# Altium PCB MGMEZZ04.PcbDoc (part 2 of 9)
Units mil, origin at the board's own origin, x right, y up, seen from the top; angles counter-clockwise.
Board outline 3790 x 5472.44 mil, 10 copper layers (TopLayer, InternalPlane1, MidLayer1, InternalPlane2, MidLayer2, MidLayer3, InternalPlane3, MidLayer4, InternalPlane4, BottomLayer), stack 57.08 mil thick; 846 components, 745 nets, 3323 pads, 1906 vias.
Unrouted connection lines stored in the file: 128.
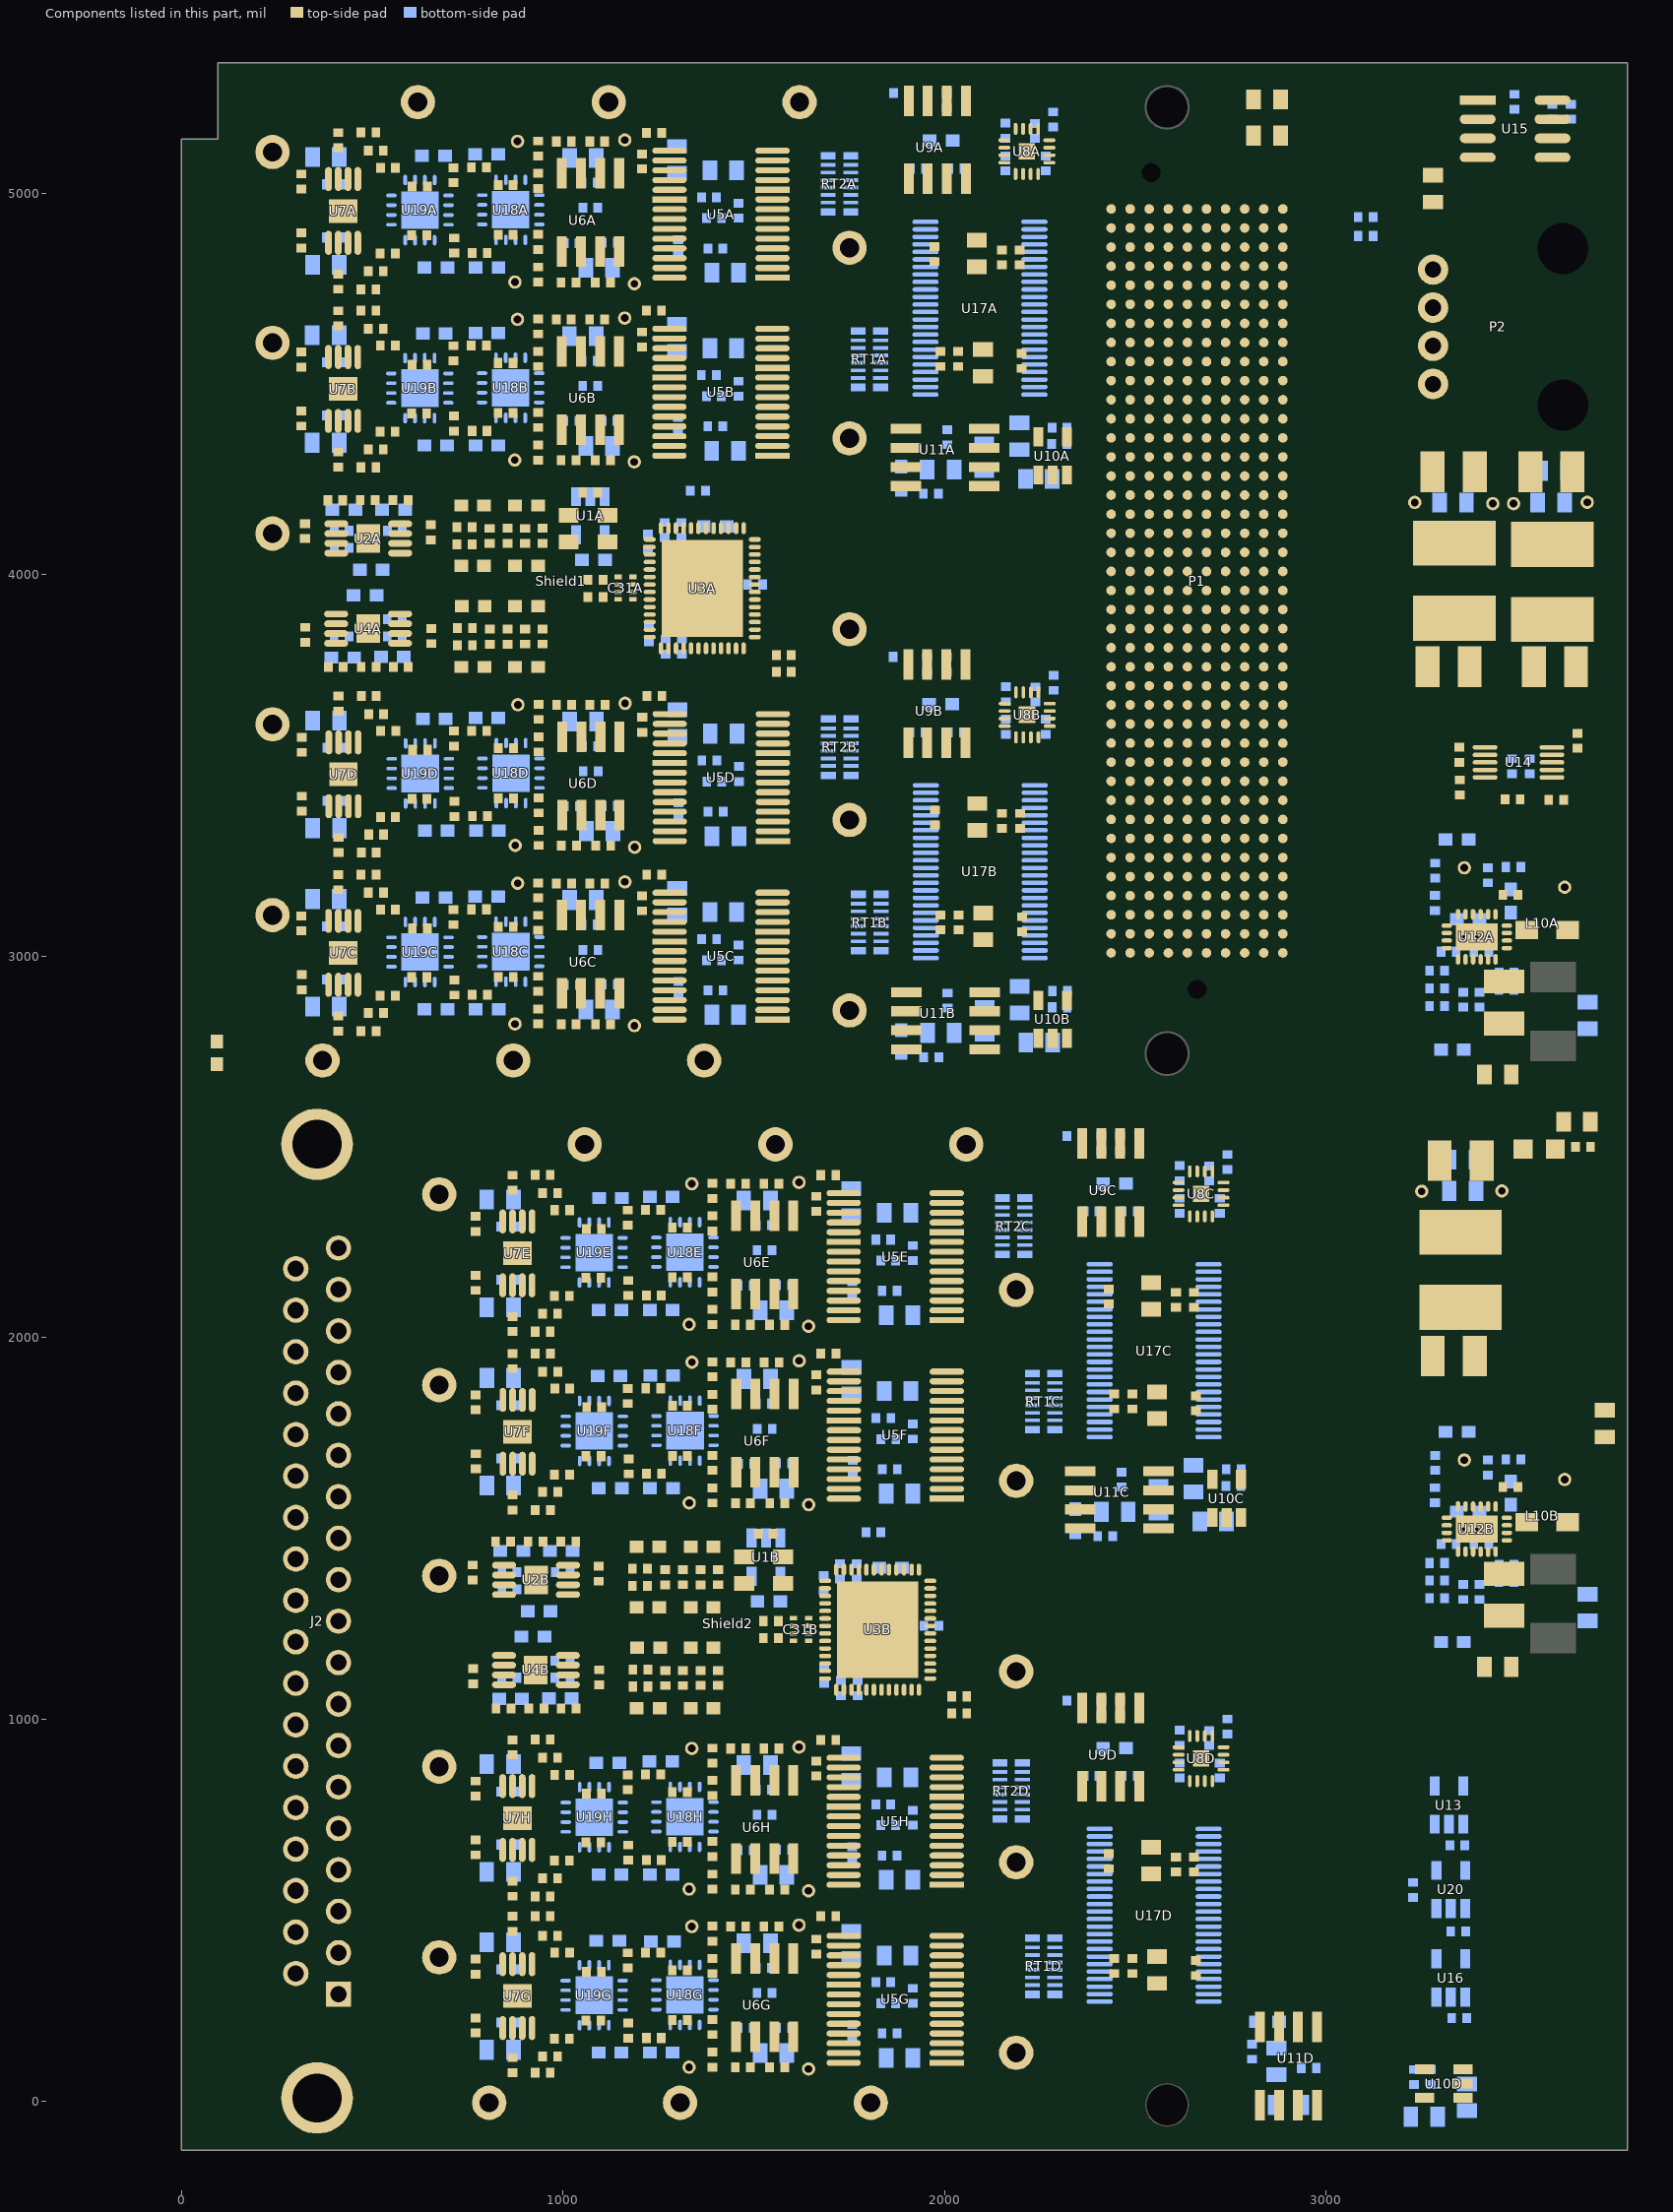
[diagram p10: the components of this part, seen from the top]

## Components (designator, comment, footprint, x,y, rotation, side; value= is the part's Value field where it differs from the comment) (continued)
C95C "0.1uF, 0402" 0402 603.85,2945.02 r0 top (schematic designator C95)
C95D "0.1uF, 0402" 0402 604.47,3412.99 r0 top (schematic designator C95)
C95E "0.1uF, 0402" 0402 1060.16,2157.34 r0 top (schematic designator C95)
C95F "0.1uF, 0402" 0402 1060.54,1689.63 r0 top (schematic designator C95)
C95G "0.1uF, 0402" 0402 1060.16,210.63 r0 top (schematic designator C95)
C95H "0.1uF, 0402" 0402 1060.16,677.34 r0 top (schematic designator C95)
C96A "4.7uF, 10V" 0805 1087.11,5092.29 r180 bottom (schematic designator C96)
C96B "4.7uF, 10V" 0805 1086.86,4625.62 r180 bottom (schematic designator C96)
C96C "4.7uF, 10V" 0805 1087.31,3147.66 r180 bottom (schematic designator C96)
C96D "4.7uF, 10V" 0805 1087.92,3615.62 r180 bottom (schematic designator C96)
C96E "4.7uF, 10V" 0805 1543.61,2359.98 r180 bottom (schematic designator C96)
C96F "4.7uF, 10V" 0805 1544,1892.27 r180 bottom (schematic designator C96)
C96G "4.7uF, 10V" 0805 1543.61,413.27 r180 bottom (schematic designator C96)
C96H "4.7uF, 10V" 0805 1543.61,879.98 r180 bottom (schematic designator C96)
C97A "0.1uF, 0402" 0402 1258.48,5158.65 r180 top (schematic designator C97)
C97B "0.1uF, 0402" 0402 1258.23,4691.99 r180 top (schematic designator C97)
C97C "0.1uF, 0402" 0402 1258.68,3214.02 r180 top (schematic designator C97)
C97D "0.1uF, 0402" 0402 1259.29,3681.99 r180 top (schematic designator C97)
C97E "0.1uF, 0402" 0402 1714.98,2426.34 r180 top (schematic designator C97)
C97F "0.1uF, 0402" 0402 1715.37,1958.63 r180 top (schematic designator C97)
C97G "0.1uF, 0402" 0402 1714.98,483.63 r180 top (schematic designator C97)
C97H "0.1uF, 0402" 0402 1714.98,946.34 r180 top (schematic designator C97)
C98A "DNL" 0805 1299.11,5052.65 r90 bottom (schematic designator C98)
C98B "DNL" 0805 1298.86,4585.99 r90 bottom (schematic designator C98)
C98C "DNL" 0805 1299.31,3108.02 r90 bottom (schematic designator C98)
C98D "DNL" 0805 1299.92,3575.99 r90 bottom (schematic designator C98)
C98E "DNL" 0805 1755.61,2320.34 r90 bottom (schematic designator C98)
C98F "DNL" 0805 1756,1852.63 r90 bottom (schematic designator C98)
C98G "DNL" 0805 1755.61,373.63 r90 bottom (schematic designator C98)
C98H "DNL" 0805 1755.61,840.34 r90 bottom (schematic designator C98)
C99 "0.1uF, 0402" 0402 3493,5220 r90 bottom
C100 "33uF" CC3225-1210 3333.88,4270 r180 top
C101 "33uF" CC3225-1210 3320.88,3759.14 r0 top
C102A "4.7uF, 10V" 0805 2024.71,4276 r180 bottom (schematic designator C102)
C102B "4.7uF, 10V" 0805 2025.53,2799.34 r180 bottom (schematic designator C102)
C102C "4.7uF, 10V" 0805 2481.22,1543.69 r180 bottom (schematic designator C102)
C102D "4.7uF, 10V" 0805 2869.53,68.36 r90 bottom (schematic designator C102)
C104 "0.1uF, 0402" 0402 3486.98,3517.61 r270 bottom
C110A "4.7uF, 10V" 0805 2196,4328 r90 bottom (schematic designator C110)
C110B "4.7uF, 10V" 0805 2196.81,2851.34 r90 bottom (schematic designator C110)
C110C "4.7uF, 10V" 0805 2652.5,1595.69 r90 bottom (schematic designator C110)
C110D "4.7uF, 10V" 0805 3291.81,-41.81 r180 bottom (schematic designator C110)
C114A "4.7uF, 10V" 0805 2084.93,4877.02 r270 top (schematic designator C114)
C114B "4.7uF, 10V" 0805 2085.74,3400.36 r270 top (schematic designator C114)
C114C "4.7uF, 10V" 0805 2541.43,2144.71 r270 top (schematic designator C114)
C114D "4.7uF, 10V" 0805 2541.43,664.71 r270 top (schematic designator C114)
C115A "0.1uF, 0402" 0402 2149.93,4851.39 r270 top (schematic designator C115)
C115B "0.1uF, 0402" 0402 2150.74,3374.73 r270 top (schematic designator C115)
C115C "0.1uF, 0402" 0402 2606.43,2119.08 r270 top (schematic designator C115)
C115D "0.1uF, 0402" 0402 2606.43,639.08 r270 top (schematic designator C115)
C116A "4.7uF, 10V" 0805 2100.5,4520.22 r90 top (schematic designator C116)
C116B "4.7uF, 10V" 0805 2101.32,3043.56 r90 top (schematic designator C116)
C116C "4.7uF, 10V" 0805 2557.01,1787.91 r90 top (schematic designator C116)
C116D "4.7uF, 10V" 0805 2557.01,307.91 r90 top (schematic designator C116)
C117A "0.1uF, 0402" 0402 2035.5,4545.85 r90 top (schematic designator C117)
C117B "0.1uF, 0402" 0402 2036.32,3069.19 r90 top (schematic designator C117)
C117C "0.1uF, 0402" 0402 2492.01,1813.54 r90 top (schematic designator C117)
C117D "0.1uF, 0402" 0402 2492.01,333.54 r90 top (schematic designator C117)
DP1 "LED, 0805, Yellow" 0805L 3600,2495 r180 top
In1 "TestPoint" TP-3520-SK 3684,4190 r0 bottom
In2 "TestPoint" TP-3520-SK 3491,4186.42 r0 bottom
IoutA1A "TestPoint" TP-3520-SK 1187.11,4762.65 r270 top (schematic designator IoutA1)
IoutA1B "TestPoint" TP-3520-SK 1186.86,4295.99 r270 top (schematic designator IoutA1)
IoutA1C "TestPoint" TP-3520-SK 1187.31,2818.02 r270 top (schematic designator IoutA1)
IoutA1D "TestPoint" TP-3520-SK 1187.92,3285.99 r270 top (schematic designator IoutA1)
IoutA1E "TestPoint" TP-3520-SK 1643.61,2030.34 r270 top (schematic designator IoutA1)
IoutA1F "TestPoint" TP-3520-SK 1644,1562.63 r270 top (schematic designator IoutA1)
IoutA1G "TestPoint" TP-3520-SK 1643.61,83.63 r270 top (schematic designator IoutA1)
IoutA1H "TestPoint" TP-3520-SK 1643.61,550.34 r270 top (schematic designator IoutA1)
IoutB1A "TestPoint" TP-3520-SK 1162.11,5139.65 r270 top (schematic designator IoutB1)
IoutB1B "TestPoint" TP-3520-SK 1161.86,4672.99 r270 top (schematic designator IoutB1)
IoutB1C "TestPoint" TP-3520-SK 1162.31,3195.02 r270 top (schematic designator IoutB1)
IoutB1D "TestPoint" TP-3520-SK 1162.92,3662.99 r270 top (schematic designator IoutB1)
IoutB1E "TestPoint" TP-3520-SK 1618.61,2407.34 r270 top (schematic designator IoutB1)
IoutB1F "TestPoint" TP-3520-SK 1619,1939.63 r270 top (schematic designator IoutB1)
IoutB1G "TestPoint" TP-3520-SK 1618.61,460.63 r270 top (schematic designator IoutB1)
IoutB1H "TestPoint" TP-3520-SK 1618.61,927.34 r270 top (schematic designator IoutB1)
Ip1 "TestPoint" TP-3520-SK 3460.38,2385 r270 bottom
Ip2 "TestPoint" TP-3520-SK 3250.38,2384 r270 bottom
Ip3 "TestPoint" TP-3520-SK 3436.65,4186.42 r0 bottom
Ip4 "TestPoint" TP-3520-SK 3232,4189.42 r0 bottom
J2 "DB37F_Resize" DSUB37-F -18.11,931.67 r90 top
L1A "2.7uH" 0603 733.25,4181.49 r0 top (schematic designator L1)
L1B "2.7uH" 0603 1192.94,1451.84 r0 top (schematic designator L1)
L2A "2.7uH" 0603 874.88,4181.49 r0 top (schematic designator L2)
L2B "2.7uH" 0603 1334.57,1451.84 r0 top (schematic designator L2)
L3A "2.7uH" 0603 733.25,4023.49 r0 top (schematic designator L3)
L3B "2.7uH" 0603 1192.94,1293.84 r0 top (schematic designator L3)
L4A "2.7uH" 0603 874.88,4023.49 r0 top (schematic designator L4)
L4B "2.7uH" 0603 1334.57,1293.84 r0 top (schematic designator L4)
L5A "2.7uH" 0603 735.07,3917.49 r0 top (schematic designator L5)
L5B "2.7uH" 0603 1194.76,1187.84 r0 top (schematic designator L5)
L6A "2.7uH" 0603 874.88,3917.49 r0 top (schematic designator L6)
L6B "2.7uH" 0603 1334.57,1187.84 r0 top (schematic designator L6)
L7A "2.7uH" 0603 733.88,3758.49 r0 top (schematic designator L7)
L7B "2.7uH" 0603 1193.57,1028.84 r0 top (schematic designator L7)
L8A "2.7uH" 0603 874.88,3758.49 r0 top (schematic designator L8)
L8B "2.7uH" 0603 1334.57,1028.84 r0 top (schematic designator L8)
L9 "68uH" CHOKEPM54 3335.53,4082.69 r270 top
L10A "1.5uH" IHLP-1212 3579.14,3069.01 r0 top (schematic designator L10)
L10B "1.5uH" IHLP-1212 3579.14,1516.63 r0 top (schematic designator L10)
L12 "68uH" CHOKEPM54 3351.92,2276.27 r270 top
L13 "68uH" CHOKEPM54 3592.42,3883.55 r90 top
P1 "Samtec - ASP-134602-01" BTB-SM1-27-2V400M 2661.42,3983.86 r270 top locked
P2 "Molex 0705550038" Molex0705550038 3280,4500 r90 top
R1A "402" 0402 654.11,4131.05 r270 top (schematic designator R1)
R1B "402" 0402 1093.8,1401.4 r270 top (schematic designator R1)
R2A "49.9" 0402 722.51,4124.49 r0 top (schematic designator R2)
R2B "49.9" 0402 1182.2,1394.84 r0 top (schematic designator R2)
R3A "49.9" 0402 554.74,4195.77 r0 top (schematic designator R3)
R3B "49.9" 0402 994.43,1466.12 r0 top (schematic designator R3)
R4A "DNL" 0402 468.74,4195.77 r0 top (schematic designator R4)
R4B "DNL" 0402 908.43,1466.12 r0 top (schematic designator R4)
R5A "100" 0402 946.88,4082.49 r90 top (schematic designator R5)
R5B "100" 0402 1406.57,1352.84 r90 top (schematic designator R5)
R6A "49.9" 0402 423.11,4195.05 r180 top (schematic designator R6)
R6B "49.9" 0402 862.8,1465.4 r180 top (schematic designator R6)
R7A "49.9" 0402 722.51,4079.49 r0 top (schematic designator R7)
R7B "49.9" 0402 1182.2,1349.84 r0 top (schematic designator R7)
R8A "402" 0402 324.11,4134.05 r270 top (schematic designator R8)
R8B "402" 0402 763.8,1404.4 r270 top (schematic designator R8)
R9A "402" 0402 325.17,3822.82 r90 top (schematic designator R9)
R9B "402" 0402 764.86,1093.17 r90 top (schematic designator R9)
R10A "49.9" 0402 723.51,3860.49 r0 top (schematic designator R10)
R10B "49.9" 0402 1183.2,1130.84 r0 top (schematic designator R10)
R11A "49.9" 0402 424.54,3758.1 r180 top (schematic designator R11)
R11B "49.9" 0402 864.23,1028.46 r180 top (schematic designator R11)
R12A "DNL" 0402 510.54,3758.1 r180 top (schematic designator R12)
R12B "DNL" 0402 950.23,1028.46 r180 top (schematic designator R12)
R13A "100" 0402 946.88,3818.49 r90 top (schematic designator R13)
R13B "100" 0402 1406.57,1088.84 r90 top (schematic designator R13)
R14A "49.9" 0402 555.45,3758.1 r0 top (schematic designator R14)
R14B "49.9" 0402 995.14,1028.46 r0 top (schematic designator R14)
R15A "49.9" 0402 723.51,3815.49 r0 top (schematic designator R15)
R15B "49.9" 0402 1183.2,1085.84 r0 top (schematic designator R15)
R16A "402" 0402 655.17,3819.82 r90 top (schematic designator R16)
R16B "402" 0402 1094.86,1090.17 r90 top (schematic designator R16)
R17A "2k" 0402 1334.11,4220.05 r0 bottom (schematic designator R17)
R17B "2k" 0402 1793.8,1490.4 r0 bottom (schematic designator R17)
R18A "249" 0402 510,5159 r180 top (schematic designator R18)
R18B "249" 0402 509.75,4692.34 r180 top (schematic designator R18)
R18C "249" 0402 510.2,3214.37 r180 top (schematic designator R18)
R18D "249" 0402 510.81,3682.34 r180 top (schematic designator R18)
R18E "249" 0402 966.5,2426.69 r180 top (schematic designator R18)
R18F "249" 0402 966.89,1958.98 r180 top (schematic designator R18)
R18G "249" 0402 966.5,483.98 r180 top (schematic designator R18)
R18H "249" 0402 966.5,946.69 r180 top (schematic designator R18)
R19A "450" 0402 1022.11,5135.65 r180 top (schematic designator R19)
R19B "450" 0402 1021.86,4668.99 r180 top (schematic designator R19)
R19C "450" 0402 1022.31,3191.02 r180 top (schematic designator R19)
R19D "450" 0402 1022.92,3658.99 r180 top (schematic designator R19)
R19E "450" 0402 1478.61,2403.34 r180 top (schematic designator R19)
R19F "450" 0402 1479,1935.63 r180 top (schematic designator R19)
R19G "450" 0402 1478.61,456.63 r180 top (schematic designator R19)
R19H "450" 0402 1478.61,923.34 r180 top (schematic designator R19)
R20A "2k, 0.5%, 25ppm" 0402 1207.11,5103.02 r270 top (schematic designator R20)
R20B "2k, 0.5%, 25ppm" 0402 1206.86,4636.36 r270 top (schematic designator R20)
R20C "2k, 0.5%, 25ppm" 0402 1207.31,3158.39 r270 top (schematic designator R20)
R20D "2k, 0.5%, 25ppm" 0402 1207.92,3626.36 r270 top (schematic designator R20)
R20E "2k, 0.5%, 25ppm" 0402 1663.61,2370.71 r270 top (schematic designator R20)
R20F "2k, 0.5%, 25ppm" 0402 1664,1903 r270 top (schematic designator R20)
R20G "2k, 0.5%, 25ppm" 0402 1663.61,424 r270 top (schematic designator R20)
R20H "2k, 0.5%, 25ppm" 0402 1663.61,890.71 r270 top (schematic designator R20)
R21 "10k" 0402 3593,5233.37 r270 bottom
R22A "0" 0402 1070.11,5135.65 r0 top (schematic designator R22)
R22B "0" 0402 1069.86,4668.99 r0 top (schematic designator R22)
R22C "0" 0402 1070.31,3191.02 r0 top (schematic designator R22)
R22D "0" 0402 1070.92,3658.99 r0 top (schematic designator R22)
R22E "0" 0402 1526.61,2403.34 r0 top (schematic designator R22)
R22F "0" 0402 1527,1935.63 r0 top (schematic designator R22)
R22G "0" 0402 1526.61,456.63 r0 top (schematic designator R22)
R22H "0" 0402 1526.61,923.34 r0 top (schematic designator R22)
R23A "249" 0402 529.37,5111.45 r180 top (schematic designator R23)
R23B "249" 0402 529.12,4644.79 r180 top (schematic designator R23)
R23C "249" 0402 529.57,3166.82 r180 top (schematic designator R23)
R23D "249" 0402 530.18,3634.79 r180 top (schematic designator R23)
R23E "249" 0402 985.87,2379.14 r180 top (schematic designator R23)
R23F "249" 0402 986.26,1911.43 r180 top (schematic designator R23)
R23G "249" 0402 985.87,432.43 r180 top (schematic designator R23)
R23H "249" 0402 985.87,899.14 r180 top (schematic designator R23)
R24A "10" 0402 314.75,5050.52 r270 top (schematic designator R24)
R24B "10" 0402 314.51,4583.86 r270 top (schematic designator R24)
R24C "10" 0402 314.95,3105.89 r270 top (schematic designator R24)
R24D "10" 0402 315.57,3573.86 r270 top (schematic designator R24)
R24E "10" 0402 771.26,2318.21 r270 top (schematic designator R24)
R24F "10" 0402 771.64,1850.5 r270 top (schematic designator R24)
R24G "10" 0402 771.26,371.5 r270 top (schematic designator R24)
R24H "10" 0402 771.26,838.21 r270 top (schematic designator R24)
R25 "0" 0402 3641,5194 r90 bottom
R26A "249" 0402 529.37,4795.85 r180 top (schematic designator R26)
R26B "249" 0402 529.12,4329.19 r180 top (schematic designator R26)
R26C "249" 0402 529.57,2851.22 r180 top (schematic designator R26)
R26D "249" 0402 530.18,3319.19 r180 top (schematic designator R26)
R26E "249" 0402 985.87,2063.54 r180 top (schematic designator R26)
R26F "249" 0402 986.26,1595.83 r180 top (schematic designator R26)
R26G "249" 0402 985.87,116.83 r180 top (schematic designator R26)
R26H "249" 0402 985.87,583.54 r180 top (schematic designator R26)
R27A "78.7k" 0402 2321.02,4385.43 r180 bottom (schematic designator R27)
R27B "78.7k" 0402 2321.83,2908.77 r180 bottom (schematic designator R27)
R27C "78.7k" 0402 2777.52,1655.12 r180 bottom (schematic designator R27)
R27D "78.7k" 0402 3230.39,82.21 r270 bottom (schematic designator R27)
R28A "24.9k" 0402 2281,4342.99 r0 bottom (schematic designator R28)
R28B "24.9k" 0402 2281.81,2866.32 r0 bottom (schematic designator R28)
R28C "24.9k" 0402 2737.5,1611.68 r0 bottom (schematic designator R28)
R28D "24.9k" 0402 3273.83,43.19 r90 bottom (schematic designator R28)
R29A "10" 0402 314.75,4856.63 r90 top (schematic designator R29)
R29B "10" 0402 314.51,4389.97 r90 top (schematic designator R29)
R29C "10" 0402 315.2,2912.25 r90 top (schematic designator R29)
R29D "10" 0402 315.81,3380.21 r90 top (schematic designator R29)
R29E "10" 0402 771.5,2124.57 r90 top (schematic designator R29)
R29F "10" 0402 771.89,1656.86 r90 top (schematic designator R29)
R29G "10" 0402 771.5,177.86 r90 top (schematic designator R29)
R29H "10" 0402 771.5,644.57 r90 top (schematic designator R29)
R30A "0" 0402 1124.48,4766.45 r180 top (schematic designator R30)
R30B "0" 0402 1124.23,4299.79 r180 top (schematic designator R30)
R30C "0" 0402 1124.68,2821.82 r180 top (schematic designator R30)
R30D "0" 0402 1125.29,3289.79 r180 top (schematic designator R30)
R30E "0" 0402 1580.98,2034.14 r180 top (schematic designator R30)
R30F "0" 0402 1581.37,1566.43 r180 top (schematic designator R30)
R30G "0" 0402 1580.98,87.43 r180 top (schematic designator R30)
R30H "0" 0402 1580.98,554.14 r180 top (schematic designator R30)
R31 "100k" 0402 3123,4887.83 r180 bottom
R32 "100k" 0402 3123,4937.83 r180 bottom
R33A "450" 0402 1034.48,4766.45 r180 top (schematic designator R33)
R33B "450" 0402 1034.23,4299.79 r180 top (schematic designator R33)
R33C "450" 0402 1034.68,2821.82 r180 top (schematic designator R33)
R33D "450" 0402 1035.29,3289.79 r180 top (schematic designator R33)
R33E "450" 0402 1490.98,2034.14 r180 top (schematic designator R33)
R33F "450" 0402 1491.37,1566.43 r180 top (schematic designator R33)
R33G "450" 0402 1490.98,87.43 r180 top (schematic designator R33)
R33H "450" 0402 1490.98,554.14 r180 top (schematic designator R33)
R34A "49.9" 0402 1302.11,4878.65 r270 bottom (schematic designator R34)
R34B "49.9" 0402 1301.86,4411.99 r270 bottom (schematic designator R34)
R34C "49.9" 0402 1302.31,2934.02 r270 bottom (schematic designator R34)
R34D "49.9" 0402 1302.92,3401.99 r270 bottom (schematic designator R34)
R34E "49.9" 0402 1758.61,2146.34 r270 bottom (schematic designator R34)
R34F "49.9" 0402 1759,1678.63 r270 bottom (schematic designator R34)
R34G "49.9" 0402 1758.61,199.63 r270 bottom (schematic designator R34)
R34H "49.9" 0402 1758.61,666.34 r270 bottom (schematic designator R34)
R35A "249" 0402 510,4748.3 r180 top (schematic designator R35)
R35B "249" 0402 509.75,4281.63 r180 top (schematic designator R35)
R35C "249" 0402 510.2,2803.67 r180 top (schematic designator R35)
R35D "249" 0402 510.81,3271.63 r180 top (schematic designator R35)
R35E "249" 0402 966.5,2015.99 r180 top (schematic designator R35)
R35F "249" 0402 966.89,1548.28 r180 top (schematic designator R35)
R35G "249" 0402 966.5,73.28 r180 top (schematic designator R35)
R35H "249" 0402 966.5,535.99 r180 top (schematic designator R35)
R37A "AD0" 0402 2284.65,5212.95 r270 bottom (schematic designator R37)
R37B "AD0" 0402 2285.46,3736.29 r270 bottom (schematic designator R37)
R37C "AD0" 0402 2741.15,2480.64 r270 bottom (schematic designator R37)
R37D "AD0" 0402 2741.15,1000.64 r270 bottom (schematic designator R37)
R38A "NotAD0" 0402 2264.65,5097.95 r270 bottom (schematic designator R38)
R38B "NotAD0" 0402 2265.46,3621.29 r270 bottom (schematic designator R38)
R38C "NotAD0" 0402 2721.15,2365.64 r270 bottom (schematic designator R38)
R38D "NotAD0" 0402 2721.15,885.64 r270 bottom (schematic designator R38)
R39A "31.6k" 0603 1886,4283 r270 bottom (schematic designator R39)
R39B "31.6k" 0603 1886.81,2806.34 r270 bottom (schematic designator R39)
R39C "31.6k" 0603 2342.5,1550.69 r270 bottom (schematic designator R39)
R39D "31.6k" 0603 2876.53,207.07 r180 bottom (schematic designator R39)
R40A "100k" 0402 1984,4212 r180 bottom (schematic designator R40)
R40B "100k" 0402 1984.81,2735.34 r180 bottom (schematic designator R40)
R40C "100k" 0402 2440.5,1479.69 r180 bottom (schematic designator R40)
R40D "100k" 0402 2805.53,109.07 r90 bottom (schematic designator R40)
R41A "AD2" 0402 2159.65,5183.58 r270 bottom (schematic designator R41)
R41B "AD2" 0402 2160.46,3706.92 r270 bottom (schematic designator R41)
R41C "AD2" 0402 2616.15,2451.27 r270 bottom (schematic designator R41)
R41D "AD2" 0402 2616.15,971.27 r270 bottom (schematic designator R41)
R42A "NotAD2" 0402 2159.65,5097.95 r270 bottom (schematic designator R42)
R42B "NotAD2" 0402 2160.46,3621.29 r270 bottom (schematic designator R42)
R42C "NotAD2" 0402 2616.15,2365.64 r270 bottom (schematic designator R42)
R42D "NotAD2" 0402 2616.15,885.64 r270 bottom (schematic designator R42)
R43A "10" 0402 1956.01,5262.6 r270 bottom (schematic designator R43)
R43B "10" 0402 1954.71,3784.89 r270 bottom (schematic designator R43)
R43C "10" 0402 2410.4,2529.24 r270 bottom (schematic designator R43)
R43D "10" 0402 2410.4,1049.24 r270 bottom (schematic designator R43)
R44A "100" 0402 1911,5064.66 r0 bottom (schematic designator R44)
R44B "100" 0402 1909.7,3586.95 r0 bottom (schematic designator R44)
R44C "100" 0402 2365.39,2331.31 r0 bottom (schematic designator R44)
R44D "100" 0402 2365.39,851.31 r0 bottom (schematic designator R44)
R45A "10" 0402 2006,5262.6 r270 bottom (schematic designator R45)
R45B "10" 0402 2005.7,3784.89 r270 bottom (schematic designator R45)
R45C "10" 0402 2460.39,2529.24 r270 bottom (schematic designator R45)
R45D "10" 0402 2460.39,1049.24 r270 bottom (schematic designator R45)
R46A "100" 0402 2050.71,5064.66 r180 bottom (schematic designator R46)
R46B "100" 0402 2049.42,3586.95 r180 bottom (schematic designator R46)
R46C "100" 0402 2505.11,2331.31 r180 bottom (schematic designator R46)
R46D "100" 0402 2505.11,851.31 r180 bottom (schematic designator R46)
R47A "DNL" 0402 2007,4341 r90 bottom (schematic designator R47)
R47B "DNL" 0402 2007.81,2864.34 r90 bottom (schematic designator R47)
R47C "DNL" 0402 2463.5,1608.69 r90 bottom (schematic designator R47)
R47D "DNL" 0402 2934.53,86.07 r0 bottom (schematic designator R47)
R48 "4.99k" 0402 3692.67,2500 r180 top
R49A "0, 0805" 0805 3485,2690 r180 top (schematic designator R49)
R49B "0, 0805" 0805 3485,1137.62 r180 top (schematic designator R49)
R50A "4.99" 0402 3401.99,2866.58 r90 bottom (schematic designator R50)
R50B "4.99" 0402 3401.99,1314.21 r90 bottom (schematic designator R50)
R51A "0, 0805" 0805 3685,2810 r90 bottom (schematic designator R51)
R51B "0, 0805" 0805 3685,1257.62 r90 bottom (schematic designator R51)
R52 "100k" 0402 3348.98,3547.71 r270 top
R53A "100k" 0402 3423.99,3192.64 r90 bottom (schematic designator R53)
R53B "100k" 0402 3423.99,1640.26 r90 bottom (schematic designator R53)
R54A "DNL" 0402 3270.99,2916.01 r0 bottom (schematic designator R54)
R54B "DNL" 0402 3270.99,1363.63 r0 bottom (schematic designator R54)
R55 "0" 0603 93,2777 r270 top
R56 "100" 0402 3228,532.91 r90 bottom
R57A "160k" 0402 3386.99,3012.01 r0 bottom (schematic designator R57)
R57B "160k" 0402 3386.99,1459.63 r0 bottom (schematic designator R57)
R58A "0, 0805" 0805 3622,2566 r0 top (schematic designator R58)
R58B "0, 0805" 0805 3730,1740 r90 top (schematic designator R58)
R59A "160k" 0402 3470.62,3234.01 r0 bottom (schematic designator R59)
R59B "160k" 0402 3470.62,1681.63 r0 bottom (schematic designator R59)
R61A "13k" 0402 3309.99,2870.01 r180 bottom (schematic designator R61)
R61B "13k" 0402 3309.99,1317.63 r180 bottom (schematic designator R61)
R62 "100k" 0402 3622.37,3409.84 r180 top
R63A "100k" 0402 3284.99,3120.01 r90 bottom (schematic designator R63)
R63B "100k" 0402 3284.99,1567.63 r90 bottom (schematic designator R63)
R65A "31.6k" 0402 3285.99,3244.38 r270 bottom (schematic designator R65)
R65B "31.6k" 0402 3285.99,1692 r270 bottom (schematic designator R65)
R68 "100k" 0402 3532.98,3478.24 r90 bottom
R70 "0, 0805" 0805 3392.38,2467 r180 bottom
R71 "0.1 0805" 0805 3392.38,2385 r180 bottom
R73 "0, 0805" 0805 2810,5151 r0 top
R74 "0, 0805" 0805 2810,5246 r0 top
R75 "0, 0805" 0805 3632.42,4272.57 r180 bottom
R76 "0.1 0805" 0805 3624.42,4189.57 r180 bottom
R77 "0.1 0805" 0805 3367.65,4189.42 r180 bottom
R78 "DNL, 0805" 0805 3280,4977 r90 top
R95A "62" 0402 935.11,4806.65 r270 top (schematic designator R95)
R95B "62" 0402 934.86,4339.99 r270 top (schematic designator R95)
R95C "62" 0402 935.31,2862.02 r270 top (schematic designator R95)
R95D "62" 0402 935.92,3329.99 r270 top (schematic designator R95)
R95E "62" 0402 1391.61,2074.34 r270 top (schematic designator R95)
R95F "62" 0402 1392,1606.63 r270 top (schematic designator R95)
R95G "62" 0402 1391.61,127.63 r270 top (schematic designator R95)
R95H "62" 0402 1391.61,594.34 r270 top (schematic designator R95)
R96A "62" 0402 935.11,5097.65 r90 top (schematic designator R96)
R96B "62" 0402 934.86,4630.99 r90 top (schematic designator R96)
R96C "62" 0402 935.31,3153.02 r90 top (schematic designator R96)
R96D "62" 0402 935.92,3620.99 r90 top (schematic designator R96)
R96E "62" 0402 1391.61,2365.34 r90 top (schematic designator R96)
R96F "62" 0402 1392,1897.63 r90 top (schematic designator R96)
R96G "62" 0402 1391.61,418.63 r90 top (schematic designator R96)
R96H "62" 0402 1391.61,885.34 r90 top (schematic designator R96)
R97A "62" 0402 935.11,4852.65 r90 top (schematic designator R97)
R97B "62" 0402 934.86,4385.99 r90 top (schematic designator R97)
R97C "62" 0402 935.31,2908.02 r90 top (schematic designator R97)
R97D "62" 0402 935.92,3375.99 r90 top (schematic designator R97)
R97E "62" 0402 1391.61,2120.34 r90 top (schematic designator R97)
R97F "62" 0402 1392,1652.63 r90 top (schematic designator R97)
R97G "62" 0402 1391.61,173.63 r90 top (schematic designator R97)
R97H "62" 0402 1391.61,640.34 r90 top (schematic designator R97)
R98A "62" 0402 935.11,5012.65 r90 top (schematic designator R98)
R98B "62" 0402 934.86,4545.99 r90 top (schematic designator R98)
R98C "62" 0402 935.31,3068.02 r90 top (schematic designator R98)
R98D "62" 0402 935.92,3535.99 r90 top (schematic designator R98)
R98E "62" 0402 1391.61,2280.34 r90 top (schematic designator R98)
R98F "62" 0402 1392,1812.63 r90 top (schematic designator R98)
R98G "62" 0402 1391.61,333.63 r90 top (schematic designator R98)
R98H "62" 0402 1391.61,800.34 r90 top (schematic designator R98)
R99A "124" 0402 762.11,4843.65 r0 top (schematic designator R99)
R99B "124" 0402 761.86,4376.99 r0 top (schematic designator R99)
R99C "124" 0402 762.31,2899.02 r0 top (schematic designator R99)
R99D "124" 0402 762.92,3366.99 r0 top (schematic designator R99)
R99E "124" 0402 1218.61,2111.34 r0 top (schematic designator R99)
R99F "124" 0402 1219,1643.63 r0 top (schematic designator R99)
R99G "124" 0402 1218.61,164.63 r0 top (schematic designator R99)
R99H "124" 0402 1218.61,631.34 r0 top (schematic designator R99)
R100A "124" 0402 760.11,5067.65 r0 top (schematic designator R100)
R100B "124" 0402 759.86,4600.99 r0 top (schematic designator R100)
R100C "124" 0402 760.31,3123.02 r0 top (schematic designator R100)
R100D "124" 0402 760.92,3590.99 r0 top (schematic designator R100)
R100E "124" 0402 1216.61,2335.34 r0 top (schematic designator R100)
R100F "124" 0402 1217,1867.63 r0 top (schematic designator R100)
R100G "124" 0402 1216.61,388.63 r0 top (schematic designator R100)
R100H "124" 0402 1216.61,855.34 r0 top (schematic designator R100)
R101A "249" 0402 715.11,4882.65 r270 top (schematic designator R101)
R101B "249" 0402 714.86,4415.99 r270 top (schematic designator R101)
R101C "249" 0402 715.31,2938.02 r270 top (schematic designator R101)
R101D "249" 0402 715.92,3405.99 r270 top (schematic designator R101)
R101E "249" 0402 1171.61,2150.34 r270 top (schematic designator R101)
R101F "249" 0402 1172,1682.63 r270 top (schematic designator R101)
R101G "249" 0402 1171.61,203.63 r270 top (schematic designator R101)
R101H "249" 0402 1171.61,670.34 r270 top (schematic designator R101)
R102A "249" 0402 713.11,5027.65 r90 top (schematic designator R102)
R102B "249" 0402 712.86,4560.99 r90 top (schematic designator R102)
R102C "249" 0402 713.31,3083.02 r90 top (schematic designator R102)
R102D "249" 0402 713.92,3550.99 r90 top (schematic designator R102)
R102E "249" 0402 1169.61,2295.34 r90 top (schematic designator R102)
R102F "249" 0402 1170,1827.63 r90 top (schematic designator R102)
R102G "249" 0402 1169.61,348.63 r90 top (schematic designator R102)
R102H "249" 0402 1169.61,815.34 r90 top (schematic designator R102)
R103A "500" 0402 521.11,4841.65 r0 top (schematic designator R103)
R103B "500" 0402 520.86,4374.99 r0 top (schematic designator R103)
R103C "500" 0402 521.31,2897.02 r0 top (schematic designator R103)
R103D "500" 0402 521.92,3364.99 r0 top (schematic designator R103)
R103E "500" 0402 977.61,2109.34 r0 top (schematic designator R103)
R103F "500" 0402 978,1641.63 r0 top (schematic designator R103)
R103G "500" 0402 977.61,162.63 r0 top (schematic designator R103)
R103H "500" 0402 977.61,629.34 r0 top (schematic designator R103)
R104A "500" 0402 561.11,5067.02 r180 top (schematic designator R104)
R104B "500" 0402 560.86,4600.36 r180 top (schematic designator R104)
R104C "500" 0402 561.31,3122.39 r180 top (schematic designator R104)
R104D "500" 0402 561.92,3590.36 r180 top (schematic designator R104)
R104E "500" 0402 1017.61,2334.71 r180 top (schematic designator R104)
R104F "500" 0402 1018,1867 r180 top (schematic designator R104)
R104G "500" 0402 1017.61,388 r180 top (schematic designator R104)
R104H "500" 0402 1017.61,854.71 r180 top (schematic designator R104)
Rfb1A "100k" 0402 3491.99,2912.01 r180 bottom (schematic designator Rfb1)
Rfb1B "100k" 0402 3491.99,1359.63 r180 bottom (schematic designator Rfb1)
Rfb3A "12.1k" 0402 3300.99,3012.01 r0 bottom (schematic designator Rfb3)
Rfb3B "12.1k" 0402 3300.99,1459.63 r0 bottom (schematic designator Rfb3)
RT1A "47, EXB-2HV470JV" 0402_Array_2HV 1832.61,4634.06 r180 bottom (schematic designator RT1)
RT1B "47, EXB-2HV470JV" 0402_Array_2HV 1833.43,3157.39 r180 bottom (schematic designator RT1)
RT1C "47, EXB-2HV470JV" 0402_Array_2HV 2289.12,1901.75 r180 bottom (schematic designator RT1)
RT1D "47, EXB-2HV470JV" 0402_Array_2HV 2289.12,421.75 r180 bottom (schematic designator RT1)
RT2A "47, EXB-2HV470JV" 0402_Array_2HV 1754.06,5093.74 r180 bottom (schematic designator RT2)
RT2B "47, EXB-2HV470JV" 0402_Array_2HV 1754.87,3617.08 r180 bottom (schematic designator RT2)
RT2C "47, EXB-2HV470JV" 0402_Array_2HV 2210.56,2361.43 r180 bottom (schematic designator RT2)
RT2D "47, EXB-2HV470JV" 0402_Array_2HV 2204.06,881.43 r180 bottom (schematic designator RT2)
Shield1 "Shield" "14RA-CBS-1.5X2.5 SHIELD" 239,5239 r0 top locked
Shield2 "Shield" "14RA-CBS-1.5X2.5 SHIELD" 675.82,2507 r0 top locked
TMON2A "TestPoint" TP-3520-SK 3361.99,3232.01 r180 top (schematic designator TMON2)
TMON2B "TestPoint" TP-3520-SK 3361.99,1679.63 r180 top (schematic designator TMON2)
U1A "1.8V Low noise regulator" SOT23-5 1072.11,4204.77 r0 bottom (schematic designator U1)
U1B "1.8V Low noise regulator" SOT23-5 1531.8,1475.12 r0 bottom (schematic designator U1)
U2A "THS4131IDGNR" SOP8-EP-127P600-8N 489.83,4095.11 r0 top (schematic designator U2)
U2B "THS4131IDGNR" SOP8-EP-127P600-8N 929.52,1365.46 r0 top (schematic designator U2)
U3A "LTC2192" QFN50P800X700X80_HS-53N 1365.08,3964.6 r0 top (schematic designator U3)
U3B "LTC2192" QFN50P800X700X80_HS-53N 1824.77,1234.95 r0 top (schematic designator U3)
U4A "THS4131IDGNR" SOP8-EP-127P600-8N 489.45,3858.77 r180 top (schematic designator U4)
U4B "THS4131IDGNR" SOP8-EP-127P600-8N 929.14,1129.12 r180 top (schematic designator U4)
U5A "LTC1668IG  DAC" SOG.65M/28/WG8.20/L10.16 1548.69,4778.65 r90 top (schematic designator U5)
U5B "LTC1668IG  DAC" SOG.65M/28/WG8.20/L10.16 1548.45,4311.99 r90 top (schematic designator U5)
U5C "LTC1668IG  DAC" SOG.65M/28/WG8.20/L10.16 1548.89,2834.02 r90 top (schematic designator U5)
U5D "LTC1668IG  DAC" SOG.65M/28/WG8.20/L10.16 1549.51,3301.99 r90 top (schematic designator U5)
U5E "LTC1668IG  DAC" SOG.65M/28/WG8.20/L10.16 2005.2,2046.34 r90 top (schematic designator U5)
U5F "LTC1668IG  DAC" SOG.65M/28/WG8.20/L10.16 2005.58,1578.63 r90 top (schematic designator U5)
U5G "LTC1668IG  DAC" SOG.65M/28/WG8.20/L10.16 2005.2,99.63 r90 top (schematic designator U5)
U5H "LTC1668IG  DAC" SOG.65M/28/WG8.20/L10.16 2005.2,566.34 r90 top (schematic designator U5)
U6A "LT6201" SO8 997.32,4847.29 r90 top (schematic designator U6)
U6B "LT6201" SO8 997.08,4380.62 r90 top (schematic designator U6)
U6C "LT6201" SO8 997.52,2902.66 r90 top (schematic designator U6)
U6D "LT6201" SO8 998.14,3370.62 r90 top (schematic designator U6)
U6E "LT6201" SO8 1453.83,2114.98 r90 top (schematic designator U6)
U6F "LT6201" SO8 1454.21,1647.27 r90 top (schematic designator U6)
U6G "LT6201" SO8 1453.83,168.27 r90 top (schematic designator U6)
U6H "LT6201" SO8 1453.83,634.98 r90 top (schematic designator U6)
U7A "THS4131IDGNR" SOP8-EP-127P600-8N 424.11,4953.65 r270 top (schematic designator U7)
U7B "THS4131IDGNR" SOP8-EP-127P600-8N 423.86,4486.99 r270 top (schematic designator U7)
U7C "THS4131IDGNR" SOP8-EP-127P600-8N 424.31,3009.02 r270 top (schematic designator U7)
U7D "THS4131IDGNR" SOP8-EP-127P600-8N 424.92,3476.99 r270 top (schematic designator U7)
U7E "THS4131IDGNR" SOP8-EP-127P600-8N 880.61,2221.34 r270 top (schematic designator U7)
U7F "THS4131IDGNR" SOP8-EP-127P600-8N 881,1753.63 r270 top (schematic designator U7)
U7G "THS4131IDGNR" SOP8-EP-127P600-8N 880.61,274.63 r270 top (schematic designator U7)
U7H "THS4131IDGNR" SOP8-EP-127P600-8N 880.61,741.34 r270 top (schematic designator U7)
U8A "MAX7320ATE" QFN127P600-8N-MAX7319 2215.64,5109.57 r0 top (schematic designator U8)
U8B "MAX7320ATE" QFN127P600-8N-MAX7319 2216.45,3632.91 r0 top (schematic designator U8)
U8C "MAX7320ATE" QFN127P600-8N-MAX7319 2672.14,2377.26 r0 top (schematic designator U8)
U8D "MAX7320ATE" QFN127P600-8N-MAX7319 2672.14,897.26 r0 top (schematic designator U8)
U9A "Clock buffer" SO8 1906.01,5037.6 r90 top (schematic designator U9)
U9B "Clock buffer" SO8 1904.71,3559.89 r90 top (schematic designator U9)
U9C "Clock buffer" SO8 2360.4,2304.24 r90 top (schematic designator U9)
U9D "Clock buffer" SO8 2360.4,824.24 r90 top (schematic designator U9)
U10A "TPS73601DBVR" SOT23-5 2282.78,4261.42 r0 top (schematic designator U10)
U10B "TPS73601DBVR" SOT23-5 2283.59,2784.76 r0 top (schematic designator U10)
U10C "TPS73601DBVR" SOT23-5 2739.28,1529.11 r0 top (schematic designator U10)
U10D "TPS73601DBVR" SOT23-5 3358.39,44.97 r90 top (schematic designator U10)
U11A "LT1175IS8" SO8 1899.38,4382.62 r0 top (schematic designator U11)
U11B "LT1175IS8" SO8 1900.19,2905.95 r0 top (schematic designator U11)
U11C "LT1175IS8" SO8 2355.88,1650.31 r0 top (schematic designator U11)
U11D "LT1175IS8" SO8 2976.14,193.69 r270 top (schematic designator U11)
U12A "LTC3626" LTC3626 3394.78,3051.06 r270 top (schematic designator U12)
U12B "LTC3626" LTC3626 3394.78,1498.68 r270 top (schematic designator U12)
U13 "SN65LVDS1DBVR" SOT23-5 3321.37,725.43 r180 bottom
U14 "LT1715" TSSOP50P490X110-10N 3503.98,3508.24 r180 top
U15 "AT24C1024B - EEPROM" SO8/L200 3396.82,5243.6 r270 top
U16 "SN65LVDS1DBVR" SOT23-5 3326.37,271.95 r180 bottom
U17A "SN74ALVC164245DGGR  Transciever" TSSOP48-0.5mmpitch 2092.72,4698.62 r0 bottom (schematic designator U17)
U17B "SN74ALVC164245DGGR  Transciever" TSSOP48-0.5mmpitch 2093.53,3221.96 r0 bottom (schematic designator U17)
U17C "SN74ALVC164245DGGR  Transciever" TSSOP48-0.5mmpitch 2549.22,1966.31 r0 bottom (schematic designator U17)
U17D "SN74ALVC164245DGGR  Transciever" TSSOP48-0.5mmpitch 2549.22,486.31 r0 bottom (schematic designator U17)
U18A "ADG1612BCPZ" QFN127P600-8N 863.11,4956.65 r90 bottom (schematic designator U18)
U18B "ADG1612BCPZ" QFN127P600-8N 862.86,4489.99 r90 bottom (schematic designator U18)
U18C "ADG1612BCPZ" QFN127P600-8N 863.31,3012.02 r90 bottom (schematic designator U18)
U18D "ADG1612BCPZ" QFN127P600-8N 863.92,3479.99 r90 bottom (schematic designator U18)
U18E "ADG1612BCPZ" QFN127P600-8N 1319.61,2224.34 r90 bottom (schematic designator U18)
U18F "ADG1612BCPZ" QFN127P600-8N 1320,1756.63 r90 bottom (schematic designator U18)
U18G "ADG1612BCPZ" QFN127P600-8N 1319.61,277.63 r90 bottom (schematic designator U18)
U18H "ADG1612BCPZ" QFN127P600-8N 1319.61,744.34 r90 bottom (schematic designator U18)
U19A "ADG1612BCPZ" QFN127P600-8N 625.31,4955.85 r90 bottom (schematic designator U19)
U19B "ADG1612BCPZ" QFN127P600-8N 625.06,4489.19 r90 bottom (schematic designator U19)
U19C "ADG1612BCPZ" QFN127P600-8N 625.51,3011.22 r90 bottom (schematic designator U19)
U19D "ADG1612BCPZ" QFN127P600-8N 626.12,3479.19 r90 bottom (schematic designator U19)
U19E "ADG1612BCPZ" QFN127P600-8N 1081.81,2223.54 r90 bottom (schematic designator U19)
U19F "ADG1612BCPZ" QFN127P600-8N 1082.2,1755.83 r90 bottom (schematic designator U19)
U19G "ADG1612BCPZ" QFN127P600-8N 1081.81,276.83 r90 bottom (schematic designator U19)
U19H "ADG1612BCPZ" QFN127P600-8N 1082.2,743.54 r90 bottom (schematic designator U19)
U20 "SN65LVDS2DBVR" SOT23-5 3326.37,503.91 r180 bottom

## Footprints (in the part's own frame and the unit in brackets; to place one, negate y for a bottom-side part, rotate by r counter-clockwise, add the part's x,y. Pads: shape width x height; smd on the part's side, far side on the other; paste and mask are expansions set on the pad)
"14RA-CBS-1.5X2.5 SHIELD" [mil]
  round 90 hole 50: 0(0,-2131) 0(0,-1631) 0(0,-1131) 0(0,-631) 0(0,-131) 0(131,-2512) 0(381,0) 0(631,-2512) 0(881,0) 0(1131,-2512) 0(1381,0) 0(1512,-2381) 0(1512,-1881.69) 0(1512,-1381.69) 0(1512,-881.69) 0(1512,-381.69)
  TopLayer lines w75: 1512,-2381.69 1512,-1881.69 1512,-1381.69 1512,-881.69 1512,-381.69 ; 1512,-2381 1512,-2512 1131,-2512 631,-2512 131,-2512 0,-2512 0,-2131 0,-1631 0,-1131 0,-631 0,-131 0,0 381,0 881,0 1381,0 1512,0 1512,-381
  silkscreen extent -80,-2592 1592,80, body extent -80,-2590 1590,80, height 130
0402 [mm]
  rect 0.58x0.66 smd: 1(0,0) 2(1,0)
  silkscreen extent -0.5,-0.5 1.5,0.5
0402_Array_2HV [mm]
  rect 1x0.5 smd: 1(0,0.125) 8(0,-3.625) 9(1.5,-3.625) 16(1.5,0.125)
  rect 1x0.25 smd: 2(0,-0.5) 3(0,-1) 4(0,-1.5) 5(0,-2) 6(0,-2.5) 7(0,-3) 10(1.5,-3) 11(1.5,-2.5) 12(1.5,-2) 13(1.5,-1.5) 14(1.5,-1) 15(1.5,-0.5)
  silkscreen extent -0.01,-4.1 1.5,0.6
0603 [mil]
  rect 36x32 smd: 1(0,0) 2(60,0)
  silkscreen extent -30,-30 90,30
0805 [mil]
  rect 38.5x52 smd: 1(0,0) 2(70,0)
  silkscreen extent -31,-38 101,38
0805L [mil]
  rect 50x50 smd: 1(-0.4,0.18) 2(83.6,0.18)
  silkscreen extent 31,-20 52,20
BTB-SM1-27-2V400M [mm] "Board-to-Board Connector, Vertical, 10-Row, Pitch 1.27mm, 400-Position"
  round 0.64 smd: A1(24.765,5.715) A2(23.495,5.715) A3(22.225,5.715) A4(20.955,5.715) A5(19.685,5.715) A6(18.415,5.715) A7(17.145,5.715) A8(15.875,5.715) A9(14.605,5.715) A10(13.335,5.715) A11(12.065,5.715) A12(10.795,5.715) A13(9.525,5.715) A14(8.255,5.715) A15(6.985,5.715) A16(5.715,5.715) A17(4.445,5.715) A18(3.175,5.715) A19(1.905,5.715) A20(0.635,5.715) A21(-0.635,5.715) A22(-1.905,5.715) A23(-3.175,5.715) A24(-4.445,5.715) A25(-5.715,5.715) A26(-6.985,5.715) A27(-8.255,5.715) A28(-9.525,5.715) A29(-10.795,5.715) A30(-12.065,5.715) A31(-13.335,5.715) A32(-14.605,5.715) A33(-15.875,5.715) A34(-17.145,5.715) A35(-18.415,5.715) A36(-19.685,5.715) A37(-20.955,5.715) A38(-22.225,5.715) A39(-23.495,5.715) A40(-24.765,5.715) B1(24.765,4.445) B2(23.495,4.445) B3(22.225,4.445) B4(20.955,4.445) B5(19.685,4.445) B6(18.415,4.445) B7(17.145,4.445) B8(15.875,4.445) B9(14.605,4.445) B10(13.335,4.445) B11(12.065,4.445) B12(10.795,4.445) B13(9.525,4.445) B14(8.255,4.445) B15(6.985,4.445) B16(5.715,4.445) B17(4.445,4.445) B18(3.175,4.445) B19(1.905,4.445) B20(0.635,4.445) B21(-0.635,4.445) B22(-1.905,4.445) B23(-3.175,4.445) B24(-4.445,4.445) B25(-5.715,4.445) B26(-6.985,4.445) B27(-8.255,4.445) B28(-9.525,4.445) B29(-10.795,4.445) B30(-12.065,4.445) B31(-13.335,4.445) B32(-14.605,4.445) B33(-15.875,4.445) B34(-17.145,4.445) B35(-18.415,4.445) B36(-19.685,4.445) B37(-20.955,4.445) B38(-22.225,4.445) B39(-23.495,4.445) B40(-24.765,4.445) C1(24.765,3.175) C2(23.495,3.175) C3(22.225,3.175) C4(20.955,3.175) C5(19.685,3.175) C6(18.415,3.175) C7(17.145,3.175) C8(15.875,3.175) C9(14.605,3.175) C10(13.335,3.175) C11(12.065,3.175) C12(10.795,3.175) C13(9.525,3.175) C14(8.255,3.175) C15(6.985,3.175) C16(5.715,3.175) C17(4.445,3.175) C18(3.175,3.175) C19(1.905,3.175) C20(0.635,3.175) C21(-0.635,3.175) C22(-1.905,3.175) C23(-3.175,3.175) C24(-4.445,3.175) C25(-5.715,3.175) C26(-6.985,3.175) C27(-8.255,3.175) C28(-9.525,3.175) C29(-10.795,3.175) C30(-12.065,3.175) C31(-13.335,3.175) C32(-14.605,3.175) C33(-15.875,3.175) C34(-17.145,3.175) C35(-18.415,3.175) C36(-19.685,3.175) C37(-20.955,3.175) C38(-22.225,3.175) C39(-23.495,3.175) C40(-24.765,3.175) D1(24.765,1.905) D2(23.495,1.905) D3(22.225,1.905) D4(20.955,1.905) D5(19.685,1.905) D6(18.415,1.905) D7(17.145,1.905) D8(15.875,1.905) D9(14.605,1.905) D10(13.335,1.905) D11(12.065,1.905) D12(10.795,1.905) D13(9.525,1.905) D14(8.255,1.905) D15(6.985,1.905) D16(5.715,1.905) D17(4.445,1.905) D18(3.175,1.905) D19(1.905,1.905) D20(0.635,1.905) D21(-0.635,1.905) D22(-1.905,1.905) D23(-3.175,1.905) D24(-4.445,1.905) D25(-5.715,1.905) D26(-6.985,1.905) D27(-8.255,1.905) D28(-9.525,1.905) D29(-10.795,1.905) D30(-12.065,1.905) D31(-13.335,1.905) D32(-14.605,1.905) D33(-15.875,1.905) D34(-17.145,1.905) D35(-18.415,1.905) D36(-19.685,1.905) D37(-20.955,1.905) D38(-22.225,1.905) D39(-23.495,1.905) D40(-24.765,1.905) E1(24.765,0.635) E2(23.495,0.635) E3(22.225,0.635) E4(20.955,0.635) E5(19.685,0.635) E6(18.415,0.635) E7(17.145,0.635) E8(15.875,0.635) E9(14.605,0.635) E10(13.335,0.635) E11(12.065,0.635) E12(10.795,0.635) E13(9.525,0.635) E14(8.255,0.635) E15(6.985,0.635) E16(5.715,0.635) E17(4.445,0.635) E18(3.175,0.635) E19(1.905,0.635) E20(0.635,0.635) E21(-0.635,0.635) E22(-1.905,0.635) E23(-3.175,0.635) E24(-4.445,0.635) E25(-5.715,0.635) E26(-6.985,0.635) E27(-8.255,0.635) E28(-9.525,0.635) E29(-10.795,0.635) E30(-12.065,0.635) E31(-13.335,0.635) E32(-14.605,0.635) E33(-15.875,0.635) E34(-17.145,0.635) E35(-18.415,0.635) E36(-19.685,0.635) E37(-20.955,0.635) E38(-22.225,0.635) E39(-23.495,0.635) E40(-24.765,0.635) F1(24.765,-0.635) F2(23.495,-0.635) F3(22.225,-0.635) F4(20.955,-0.635) F5(19.685,-0.635) F6(18.415,-0.635) F7(17.145,-0.635) F8(15.875,-0.635) F9(14.605,-0.635) F10(13.335,-0.635) F11(12.065,-0.635) F12(10.795,-0.635) F13(9.525,-0.635) F14(8.255,-0.635) F15(6.985,-0.635) F16(5.715,-0.635) F17(4.445,-0.635) F18(3.175,-0.635) F19(1.905,-0.635) F20(0.635,-0.635) F21(-0.635,-0.635) F22(-1.905,-0.635) F23(-3.175,-0.635) F24(-4.445,-0.635) F25(-5.715,-0.635) F26(-6.985,-0.635) F27(-8.255,-0.635) F28(-9.525,-0.635) F29(-10.795,-0.635) F30(-12.065,-0.635) F31(-13.335,-0.635) F32(-14.605,-0.635) F33(-15.875,-0.635) F34(-17.145,-0.635) F35(-18.415,-0.635) F36(-19.685,-0.635) F37(-20.955,-0.635) F38(-22.225,-0.635) F39(-23.495,-0.635) F40(-24.765,-0.635) G1(24.765,-1.905) G2(23.495,-1.905) G3(22.225,-1.905) G4(20.955,-1.905) G5(19.685,-1.905) G6(18.415,-1.905) G7(17.145,-1.905) G8(15.875,-1.905) G9(14.605,-1.905) G10(13.335,-1.905) G11(12.065,-1.905) G12(10.795,-1.905) G13(9.525,-1.905) G14(8.255,-1.905) G15(6.985,-1.905) G16(5.715,-1.905) G17(4.445,-1.905) G18(3.175,-1.905) G19(1.905,-1.905) G20(0.635,-1.905) G21(-0.635,-1.905) G22(-1.905,-1.905) G23(-3.175,-1.905) G24(-4.445,-1.905) G25(-5.715,-1.905) G26(-6.985,-1.905) G27(-8.255,-1.905) G28(-9.525,-1.905) G29(-10.795,-1.905) G30(-12.065,-1.905) G31(-13.335,-1.905) G32(-14.605,-1.905) G33(-15.875,-1.905) G34(-17.145,-1.905) G35(-18.415,-1.905) G36(-19.685,-1.905) G37(-20.955,-1.905) G38(-22.225,-1.905) G39(-23.495,-1.905) G40(-24.765,-1.905) H1(24.765,-3.175) H2(23.495,-3.175) H3(22.225,-3.175) H4(20.955,-3.175) H5(19.685,-3.175) H6(18.415,-3.175) H7(17.145,-3.175) H8(15.875,-3.175) H9(14.605,-3.175) H10(13.335,-3.175) H11(12.065,-3.175) H12(10.795,-3.175) H13(9.525,-3.175) H14(8.255,-3.175) H15(6.985,-3.175) H16(5.715,-3.175) H17(4.445,-3.175) H18(3.175,-3.175) H19(1.905,-3.175) H20(0.635,-3.175) H21(-0.635,-3.175) H22(-1.905,-3.175) H23(-3.175,-3.175) H24(-4.445,-3.175) H25(-5.715,-3.175) H26(-6.985,-3.175) H27(-8.255,-3.175) H28(-9.525,-3.175) H29(-10.795,-3.175) H30(-12.065,-3.175) H31(-13.335,-3.175) H32(-14.605,-3.175) H33(-15.875,-3.175) H34(-17.145,-3.175) H35(-18.415,-3.175) H36(-19.685,-3.175) H37(-20.955,-3.175) H38(-22.225,-3.175) H39(-23.495,-3.175) H40(-24.765,-3.175) J1(24.765,-4.445) J2(23.495,-4.445) J3(22.225,-4.445) J4(20.955,-4.445) J5(19.685,-4.445) J6(18.415,-4.445) J7(17.145,-4.445) J8(15.875,-4.445) J9(14.605,-4.445) J10(13.335,-4.445) J11(12.065,-4.445) J12(10.795,-4.445) J13(9.525,-4.445) J14(8.255,-4.445) J15(6.985,-4.445) J16(5.715,-4.445) J17(4.445,-4.445) J18(3.175,-4.445) J19(1.905,-4.445) J20(0.635,-4.445) J21(-0.635,-4.445) J22(-1.905,-4.445) J23(-3.175,-4.445) J24(-4.445,-4.445) J25(-5.715,-4.445) J26(-6.985,-4.445) J27(-8.255,-4.445) J28(-9.525,-4.445) J29(-10.795,-4.445) J30(-12.065,-4.445) J31(-13.335,-4.445) J32(-14.605,-4.445) J33(-15.875,-4.445) J34(-17.145,-4.445) J35(-18.415,-4.445) J36(-19.685,-4.445) J37(-20.955,-4.445) J38(-22.225,-4.445) J39(-23.495,-4.445) J40(-24.765,-4.445) K1(24.765,-5.715) K2(23.495,-5.715) K3(22.225,-5.715) K4(20.955,-5.715) K5(19.685,-5.715) K6(18.415,-5.715) K7(17.145,-5.715) K8(15.875,-5.715) K9(14.605,-5.715) K10(13.335,-5.715) K11(12.065,-5.715) K12(10.795,-5.715) K13(9.525,-5.715) K14(8.255,-5.715) K15(6.985,-5.715) K16(5.715,-5.715) K17(4.445,-5.715) K18(3.175,-5.715) K19(1.905,-5.715) K20(0.635,-5.715) K21(-0.635,-5.715) K22(-1.905,-5.715) K23(-3.175,-5.715) K24(-4.445,-5.715) K25(-5.715,-5.715) K26(-6.985,-5.715) K27(-8.255,-5.715) K28(-9.525,-5.715) K29(-10.795,-5.715) K30(-12.065,-5.715) K31(-13.335,-5.715) K32(-14.605,-5.715) K33(-15.875,-5.715) K34(-17.145,-5.715) K35(-18.415,-5.715) K36(-19.685,-5.715) K37(-20.955,-5.715) K38(-22.225,-5.715) K39(-23.495,-5.715) K40(-24.765,-5.715)
  round 0.97 hole 1.27 unplated: MH1(-27.19,-3.05) MH2(27.19,0)
  silkscreen extent -27.89,-7.34 28.78,7.34, body extent -27.89,-7.35 28.78,7.34, height 7.21
CC3225-1210 [mm]
  rect 1.6x2.7 smd: 1(-1.4,0) 2(1.4,0)
  silkscreen extent -0.3,-1.25 0.3,1.25
CHOKEPM54 [mil]
  rect 118.1x216.53 smd: 1(-0.4,0.12) 2(196.27,0.12)
  silkscreen extent 19,-114 204,114
CLLE1 [mm] "Capacitor array"
  rect 0.3x0.5 smd paste+0 mask+0.051: 1(-0.75,0.5) 2(-0.75,-0.5) 3(-0.25,0.5) 4(-0.25,-0.5) 5(0.25,0.5) 6(0.25,-0.5) 7(0.75,0.5) 8(0.75,-0.5)
  silkscreen extent -1.03,-0.86 1.03,0.86, body extent -1,-0.63 1,0.65, height 0.51
DSUB37-F [mm] "DSUB 37Pin Female"
  rect 1.69x1.69 hole 1.09: 1(-16.566,-10.92)
  round 1.69 hole 1.09: 2(-13.806,-10.92) 3(-11.046,-10.92) 4(-8.286,-10.92) 5(-5.526,-10.92) 6(-2.766,-10.92) 7(-0.006,-10.92) 8(2.754,-10.92) 9(5.514,-10.92) 10(8.274,-10.92) 11(11.034,-10.92) 12(13.794,-10.92) 13(16.554,-10.92) 14(19.314,-10.92) 15(22.074,-10.92) 16(24.834,-10.92) 17(27.594,-10.92) 18(30.354,-10.92) 19(33.114,-10.92) 20(-15.187,-8.08) 21(-12.427,-8.08) 22(-9.667,-8.08) 23(-6.907,-8.08) 24(-4.147,-8.08) 25(-1.387,-8.08) 26(1.373,-8.08) 27(4.133,-8.08) 28(6.893,-8.08) 29(9.653,-8.08) 30(12.413,-8.08) 31(15.173,-8.08) 32(17.933,-8.08) 33(20.693,-8.08) 34(23.453,-8.08) 35(26.213,-8.08) 36(28.973,-8.08) 37(31.733,-8.08)
  round 4.76 hole 3.26: 38(-23.476,-9.5) 39(40.024,-9.5)
  silkscreen extent -26.5,-12.5 43.15,6, body extent -26.26,-12.95 43.06,6.12, height 12.55
IHLP-1212 [mm] "Inductor"
  rect 1.5x1.2 smd: 1(-1.35,0) 2(1.35,0)
  round 0.2 on Top Overlay: 2(-2.032,0.889)
  silkscreen extent -1.8,-1.6 1.8,1.6, body extent -1.91,-1.65 1.91,1.65, height 2
LTC3626 [mm] "QFN, 20-Leads, Body 4.1x3.1mm (max), Pitch 0.50mm, IPC Medium Density"
  oval 0.7x0.3 smd: 1(-1.5,1.25) 2(-1.5,0.75) 3(-1.5,0.25) 4(-1.5,-0.25) 5(-1.5,-0.75) 6(-1.5,-1.25) 11(1.5,-1.25) 12(1.5,-0.75) 13(1.5,-0.25) 14(1.5,0.25) 15(1.5,0.75) 16(1.5,1.25)
  oval 0.3x0.7 smd: 7(-0.75,-2) 8(-0.25,-2) 9(0.25,-2) 10(0.75,-2) 17(0.75,2) 18(0.25,2) 19(-0.25,2) 20(-0.75,2)
  round 0.66 hole 0.203: 21(0,0) 21(0,0.889) 21(0,-0.889)
  rect 1.8x2.8 smd: 21(0,0)
  silkscreen extent -1.83,-2.05 1.55,2.05, body extent -1.55,-2.05 1.55,2.05, height 0.8
Molex0705550038 [mil]
  round 118.11 hole 133.86 unplated: 0(-55.12,-340.55) 0(355.12,-340.55)
  round 80 hole 43: 1(300,0) 2(200,0) 3(100,0) 4(0,0)
  silkscreen extent -125,-507 425,56, body extent -125,-508 425,27, height 275
QFN50P800X700X80_HS-53N [mm] "QFN, 52-Leads, Body 8.00x7.00mm, Pitch 0.50mm, Thermal Pad 6.45x5.41mm, IPC Medium Density"
  oval 0.8x0.3 smd: 1(-3.5,3.25) 2(-3.5,2.75) 3(-3.5,2.25) 4(-3.5,1.75) 5(-3.5,1.25) 6(-3.5,0.75) 7(-3.5,0.25) 8(-3.5,-0.25) 9(-3.5,-0.75) 10(-3.5,-1.25) 11(-3.5,-1.75) 12(-3.5,-2.25) 13(-3.5,-2.75) 14(-3.5,-3.25) 27(3.5,-3.25) 28(3.5,-2.75) 29(3.5,-2.25) 30(3.5,-1.75) 31(3.5,-1.25) 32(3.5,-0.75) 33(3.5,-0.25) 34(3.5,0.25) 35(3.5,0.75) 36(3.5,1.25) 37(3.5,1.75) 38(3.5,2.25) 39(3.5,2.75) 40(3.5,3.25)
  oval 0.3x0.8 smd: 15(-2.75,-4) 16(-2.25,-4) 17(-1.75,-4) 18(-1.25,-4) 19(-0.75,-4) 20(-0.25,-4) 21(0.25,-4) 22(0.75,-4) 23(1.25,-4) 24(1.75,-4) 25(2.25,-4) 26(2.75,-4) 41(2.75,4) 42(2.25,4) 43(1.75,4) 44(1.25,4) 45(0.75,4) 46(0.25,4) 47(-0.25,4) 48(-0.75,4) 49(-1.25,4) 50(-1.75,4) 51(-2.25,4) 52(-2.75,4)
  rect 5.41x6.45 smd: 53(0,0)
  silkscreen extent -4.47,-4.2 3.7,4.2, body extent -3.55,-4.05 3.55,4.05, height 0.8
QFN127P600-8N [mm] "16-VQFN Exposed Pad for ADG1612"
  oval 0.7x0.25 smd: 1(-2,0.975) 2(-2,0.325) 3(-2,-0.325) 4(-2,-0.975) 9(2,-0.975) 10(2,-0.325) 11(2,0.325) 12(2,0.975)
  oval 0.25x0.7 smd: 5(-0.975,-1.9) 6(-0.325,-1.9) 7(0.325,-1.9) 8(0.975,-1.9) 13(0.975,1.9) 14(0.325,1.9) 15(-0.325,1.9) 16(-0.975,1.9)
  rect 2.5x2.5 smd: 17(0,0)
  silkscreen extent -2.92,-2.03 2.15,2.02, body extent -2,-1.88 2,1.87, height 1
QFN127P600-8N-MAX7319 [mm] "Drawn for MAX7319ATE+"
  oval 0.8x0.25 smd: 1(-1.5,0.75) 2(-1.5,0.25) 3(-1.5,-0.25) 4(-1.5,-0.75) 9(1.5,-0.75) 10(1.5,-0.25) 11(1.5,0.25) 12(1.5,0.75)
  oval 0.25x0.8 smd: 5(-0.75,-1.5) 6(-0.25,-1.5) 7(0.25,-1.5) 8(0.75,-1.5) 13(0.75,1.5) 14(0.25,1.5) 15(-0.25,1.5) 16(-0.75,1.5)
  rect 1.1x1.1 smd: 17(0,0)
  silkscreen extent -2.47,-1.7 1.7,1.7, body extent -1.55,-1.55 1.55,1.55, height 0.8
SO8 [mil]
  round 10 on Top Overlay: 0(-40,40)
  rect 80x26 smd: 1(0,0) 2(0,-50) 3(0,-100) 4(0,-150) 5(205,-150) 6(205,-100) 7(205,-50) 8(205,0)
  silkscreen extent -52,-180 258,30
SO8/L200 [mil]
  rect 25x94 smd: 1(-0.4,0.18)
  oval 25x94 smd: 2(49.6,0.18) 3(99.6,0.18) 4(149.6,0.18) 5(149.6,196.18) 6(99.6,196.18) 7(49.6,196.18) 8(-0.4,196.18)
  silkscreen extent -23,61 174,136